# Altium PCB SX1276_e268v01a.PcbDoc
Units mm, origin at the board's own origin, x right, y up, seen from the top; angles counter-clockwise.
Board outline 65 x 36 mm, 4 copper layers (Top Layer, MidLayer1, MidLayer2, Bottom Layer), stack 1.661 mm thick; 94 components, 81 nets, 281 pads, 641 vias.
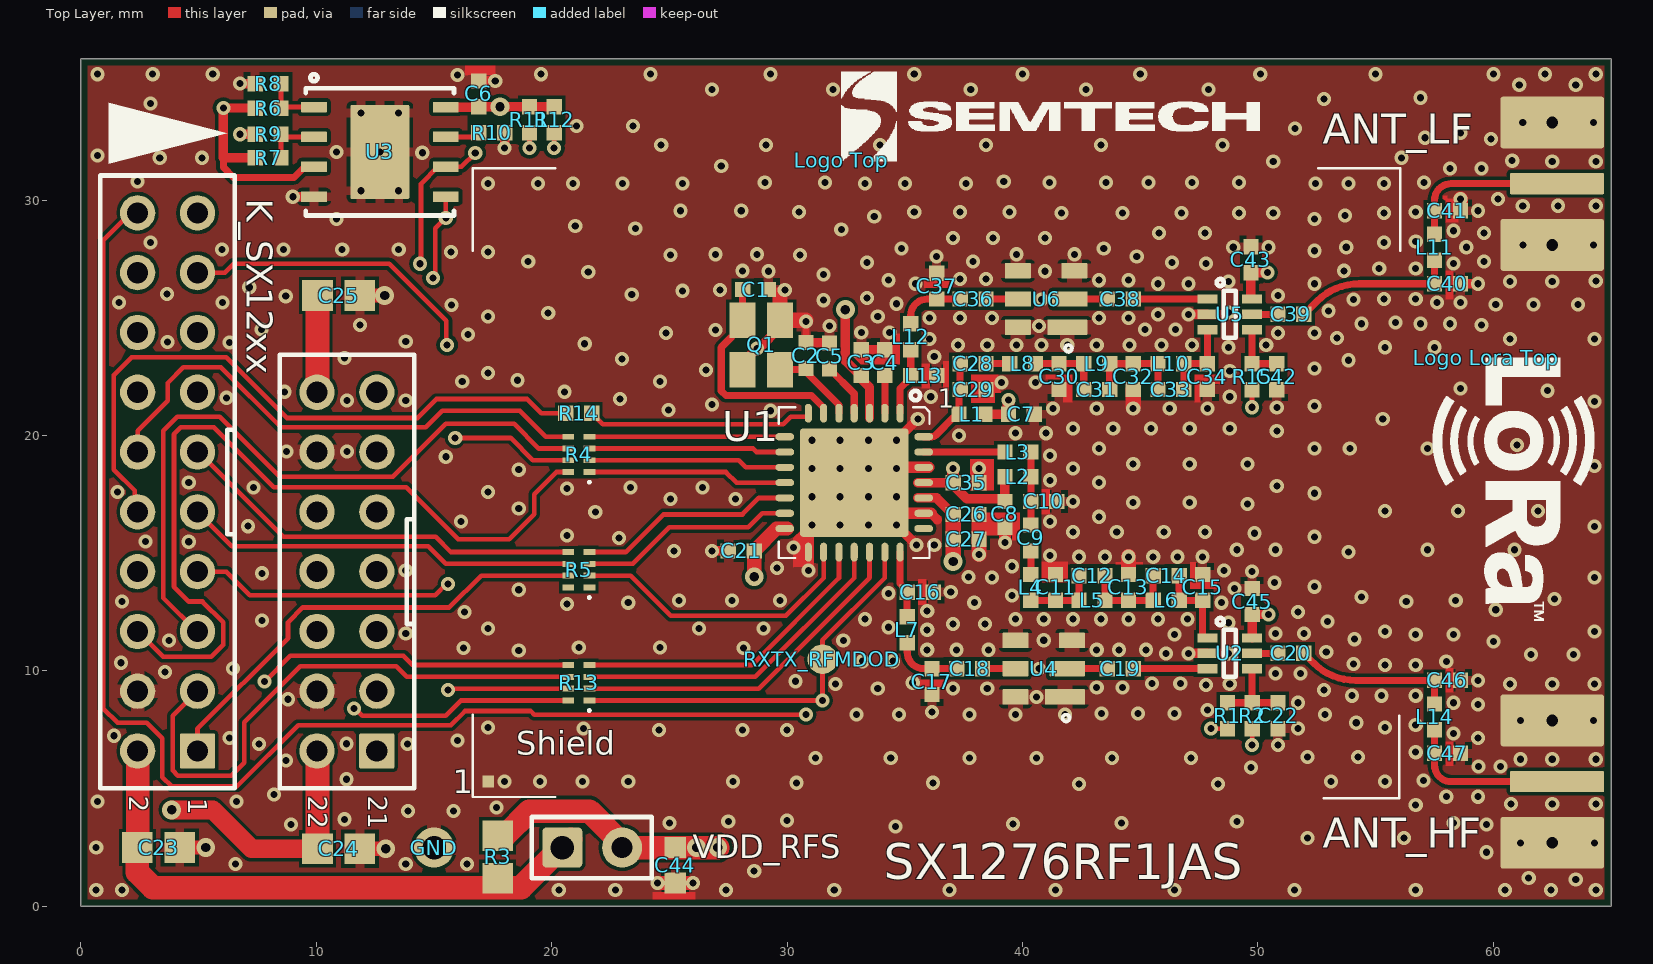
[diagram p0: Top Layer view]
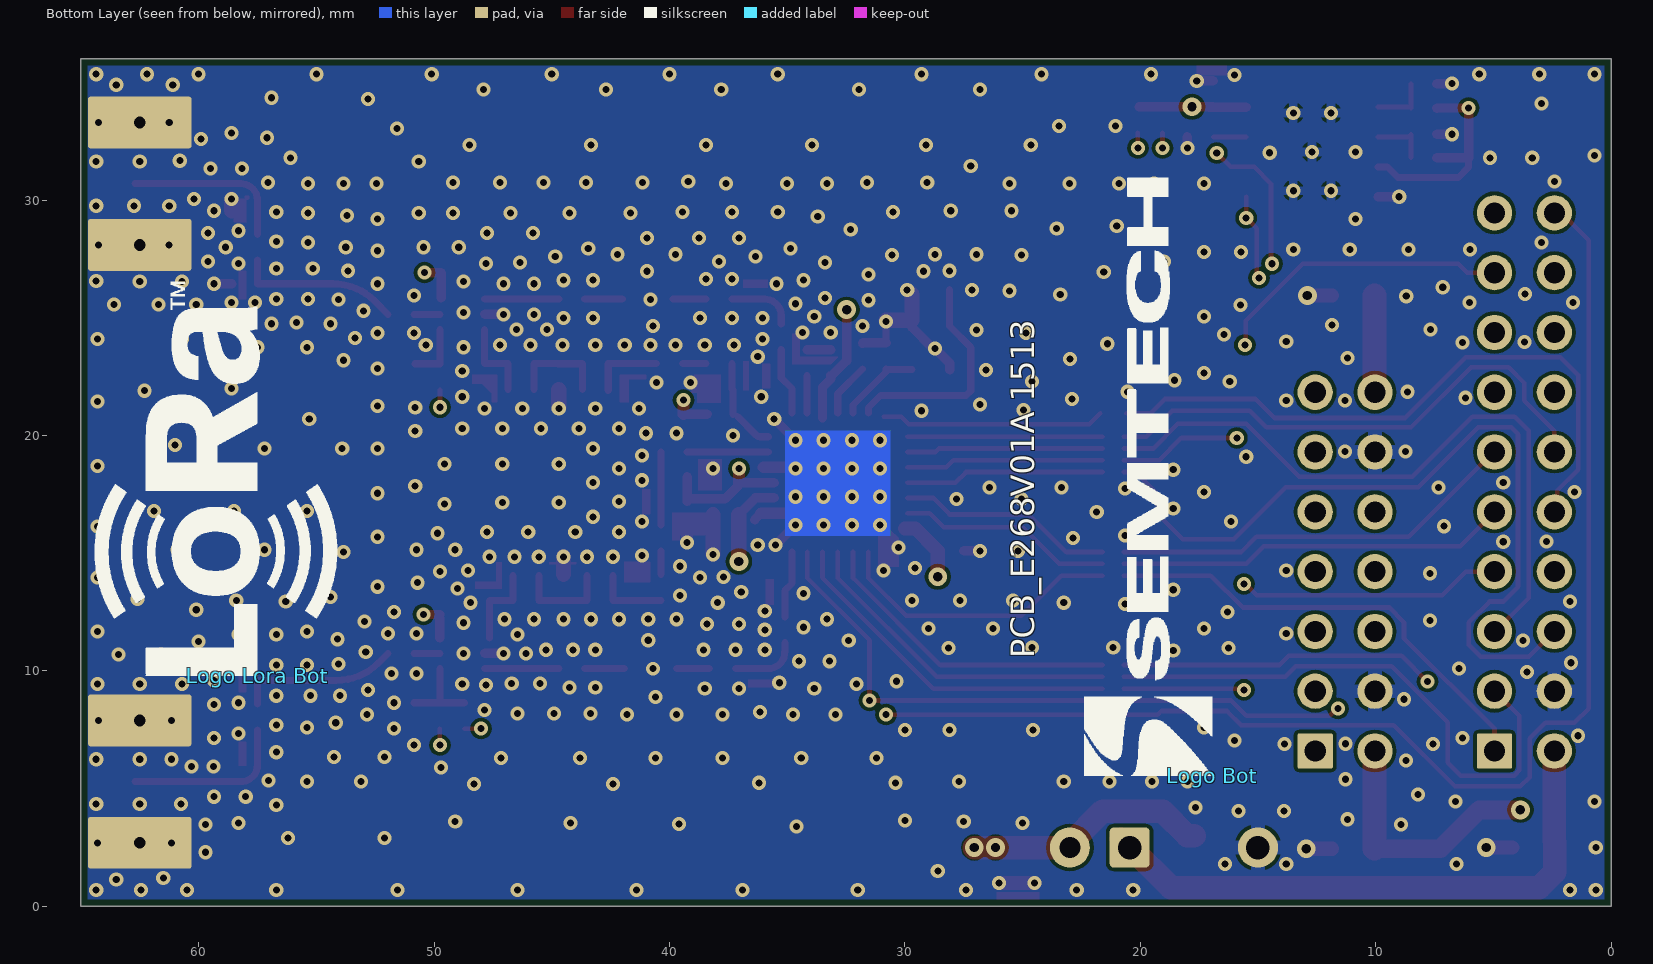
[diagram p1: Bottom Layer view, seen from below]
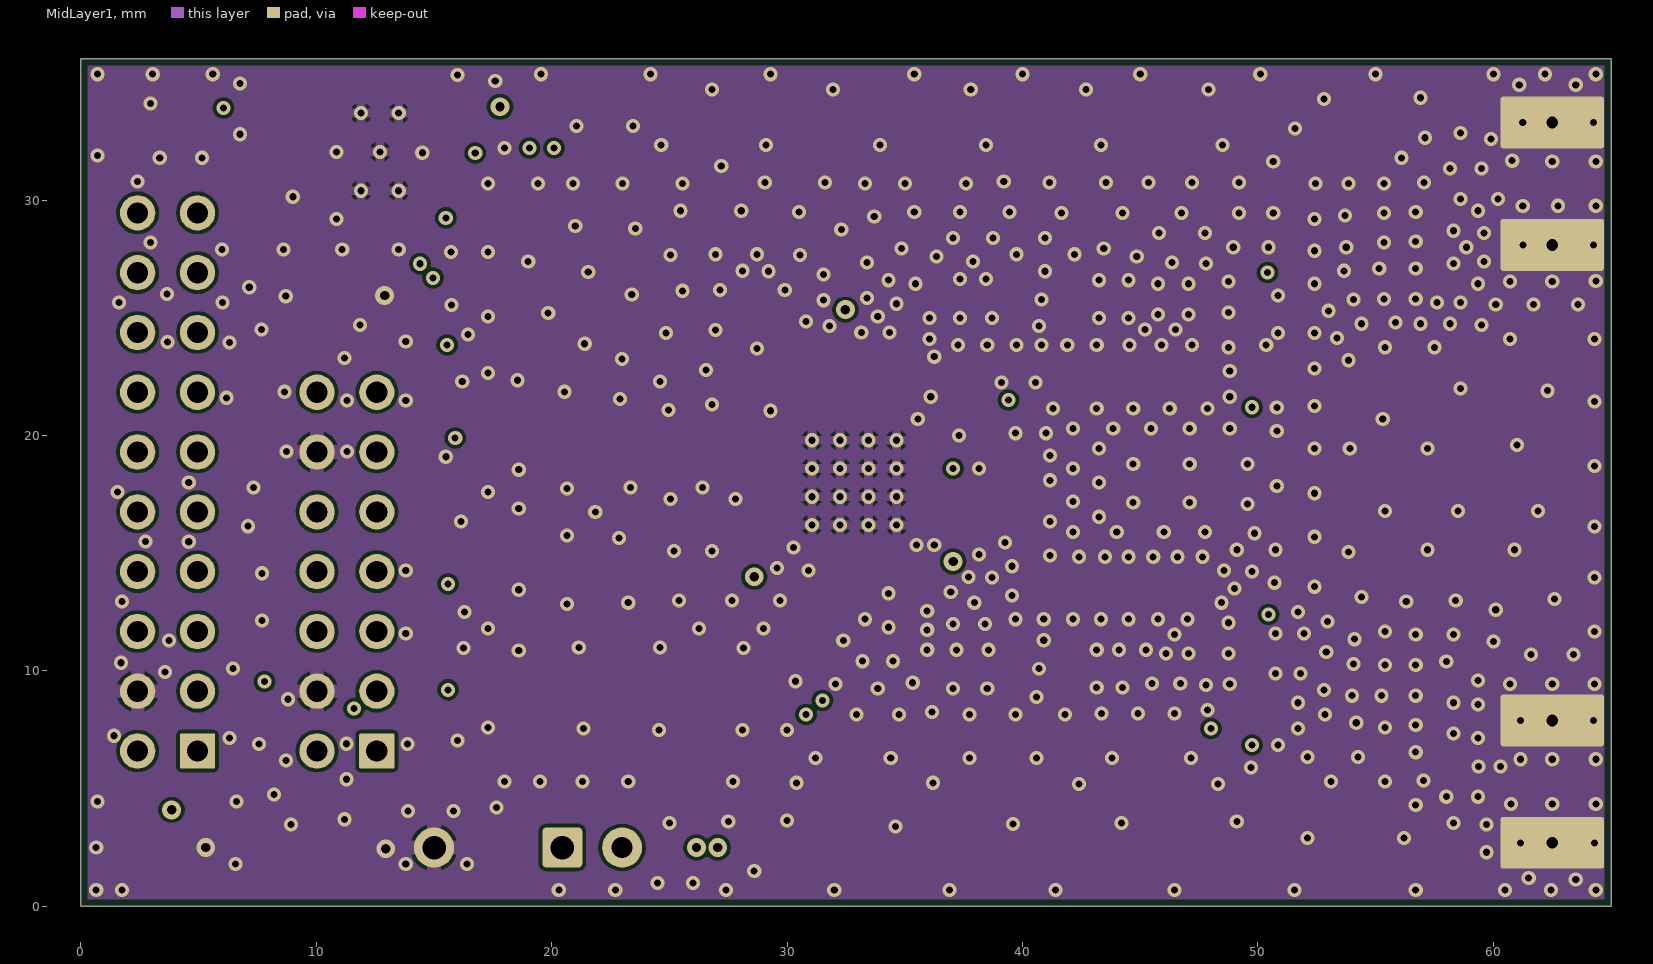
[diagram p2: MidLayer1]
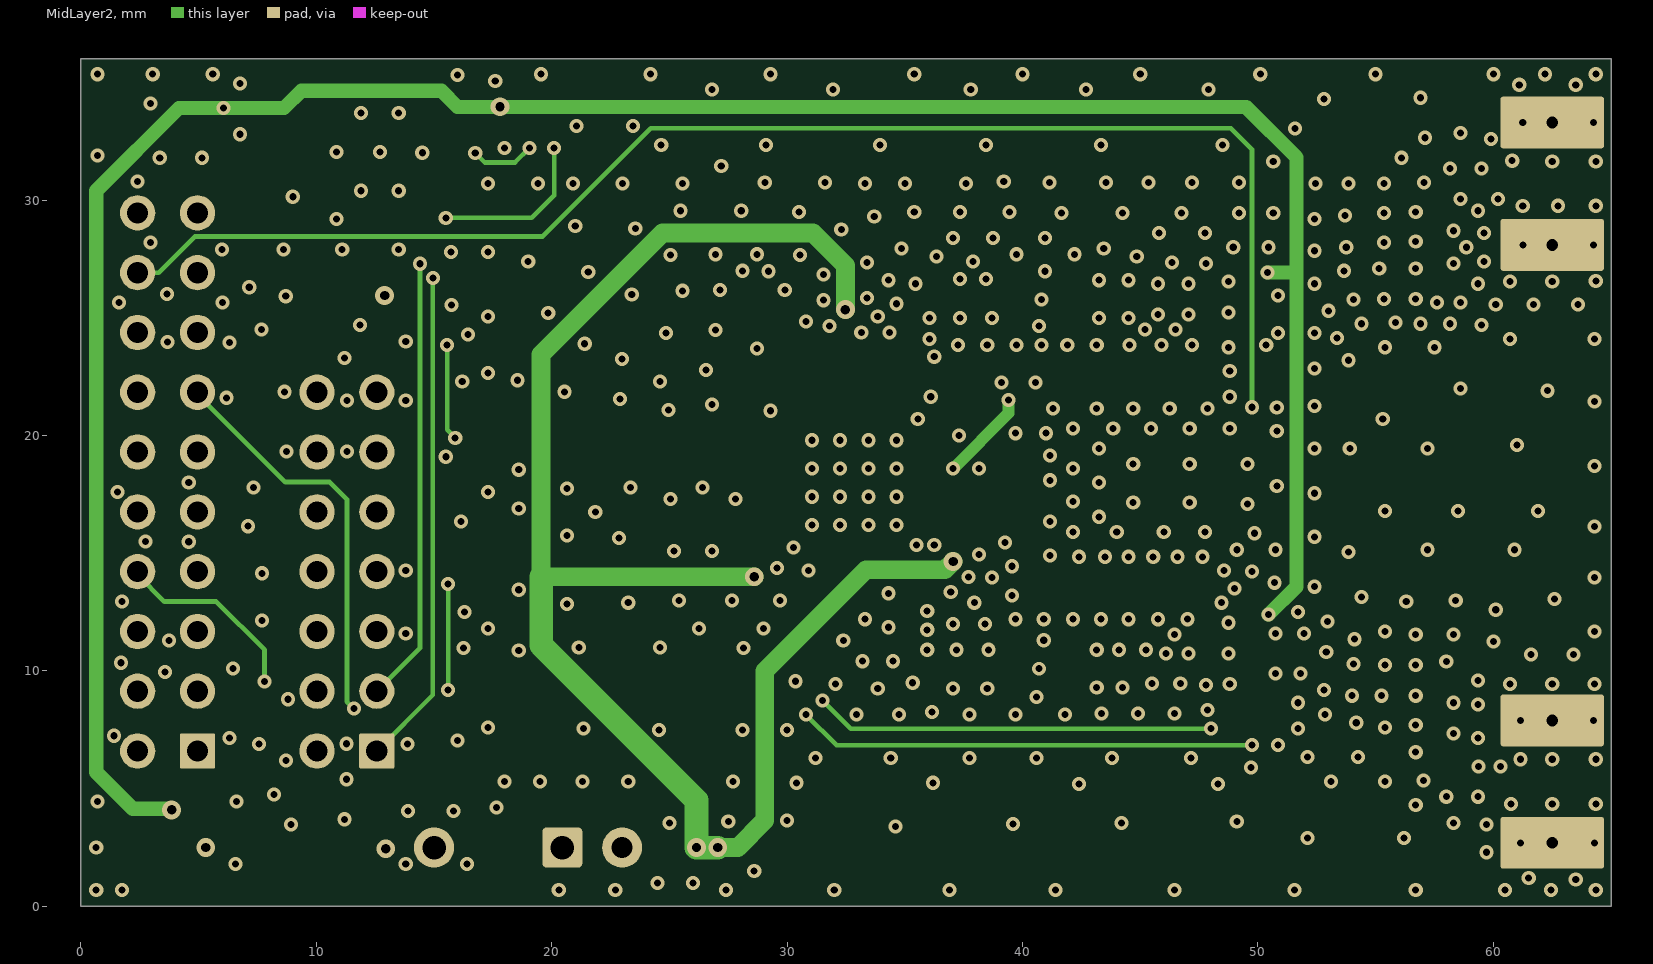
[diagram p3: MidLayer2]

## Layer stack, top to bottom
Top Layer: signal copper 0.035
Dielectric: core 0.2, FR-4, Dk 4.3
MidLayer1: signal copper 0.0356
Dielectric: prepreg 1.12, FR-4, Dk 4.3
MidLayer2: signal copper 0.0356
Dielectric: core 0.2, FR-4, Dk 4.3
Bottom Layer: signal copper 0.035

## Board outline
0,0 0,36 65,36 65,0

## Design rules (kind name [scope] priority, off if disabled: settings)
Clearance Clearance_GND [InNet('GND')] p1: gap=0.15
Clearance [All] p2: gap=0.15
ComponentClearance ComponentClearance_keepout ['SX1276_e268v01a' vs OnLayer('Mechanical 12')] p1: gap=0.25 collisioncheckmode=3 verticalgap=0.3 showdistances=FALSE
ComponentClearance [All] p2: gap=0.25 collisioncheckmode=3 verticalgap=0.3 showdistances=FALSE
HoleSize [All] p1: absolutevalues=TRUE maxlimit=3.6 minlimit=0.25 maxpercent=80.000 minpercent=20.000
HoleToHoleClearance [All] p1: gap=0.25 allowstackedmicrovias=TRUE
MinimumSolderMaskSliver [All] p1: minsoldermaskwidth=0.05
PlaneClearance [All] p1: clearance=0.2
PlaneConnect [All] p1: planeconnectstyle=Direct reliefexpansion=0.508 reliefentries=4 reliefconductorwidth=0.254 reliefairgap=0.254
PolygonConnect "PolygonConnect SAW SMD PACKAGE" [InNet('GND') vs HasFootprint('7.0X5.0MM SMD PACKAGE')   or  HasFootprint('DCC6C_3.0X3.0MM')] p1: connectstyle=Relief reliefconductorwidth=0.65 reliefentries=4 polygonreliefangle="90 Angle"
PolygonConnect "PolygonConnect SMD" [InNet('GND') vs HasFootprint('nd3225da - nd2520da') or HasFootprint('DD10_L') or HasFootprint('MSOP8')  or  HasFootprint('vqfn28_6x6mm') or HasFootprint('SOIC-SN8_L')  or HasFootprint('rlc_1206_smd capa pol') or HasFootprint('rlc_603_smd') or HasFootprint('rlc_402_smd') or HasFootprint('rlc_402_smd diode') or hasFootprint('rlc_805_smd') or HasFootprint('rlc_1210_smd')   or HasFootprint('MiniMold-6') or HasFootprint('DFN8_ 5x6mm') or HasFootprint('SC70-6')] p2: connectstyle=Relief reliefconductorwidth=0.4 reliefentries=4 polygonreliefangle="90 Angle"
PolygonConnect PolygonConnect_comp_diverse [InNet('GND') vs HasFootprint('CD1608-0603') or  HasFootprint('HDR34 Header') or  HasFootprint('BRIDGE_254MM') or  HasFootprint('pin_1mm') or HasFootprint('SMA_END_LAUNCH_JACK_RECEPTACLE')] p3: connectstyle=Relief reliefconductorwidth=0.6 reliefentries=4 polygonreliefangle="90 Angle"
PolygonConnect PolygonConnect_all [All] p4: connectstyle=Direct reliefconductorwidth=0.6 reliefentries=4 polygonreliefangle="90 Angle"
RoomDefinition SX1276_e268v01a [InComponentClass('SX1276_e268v01a')] p1: confinementstyle=ConfineOut formatcopy=TRUE lockcomponents=FALSE outline 73.45,41 73.45,52 83,52 83,41
RoutingVias [All] p1: holewidth=0.3 width=0.6 viastyle="Through Hole" minholewidth=0.25 minwidth=0.5 maxholewidth=0.4 maxwidth=0.8
SilkToSilkClearance [All] p1: silktosilkclearance=0.05
SilkscreenOverComponentPads [All] p1: minsilkscreentomaskgap=0.05
SolderMaskExpansion [All] p1: expansion=0.05
Width "Width GND" [InNet('GND')] p1: maxlimit=3 minlimit=0.2 preferedwidth=0.4
Width Width_VCC [InNet('VDD_RF') or  InNet('VDD_RFS') or  InNet('VCC') or  InNet('VBAT') or InNet('VSUPERCAP') or InNet('VCC_FEM')   or InNet('VCC_PA')] p2: maxlimit=2 minlimit=0.2 preferedwidth=0.8
Width "Width All" [All] p3: maxlimit=2 minlimit=0.15 preferedwidth=0.2
20 further rules are at their usual default settings.

## Components (designator, comment, footprint, x,y, rotation, side; value= is the part's Value field where it differs from the comment)
ANT_HF "SMA" "SMA END LAUNCH JACK RECEPTACLE SHORT" 62.7,5.3 r90 top locked
ANT_LF "SMA" "SMA END LAUNCH JACK RECEPTACLE SHORT" 62.7,30.7 r90 top locked
C1 "Cap" rlc_402_smd 28.66,26.203 r180 top
C2 "Cap" rlc_402_smd 30.798,23.4 r270 top
C3 "Cap" rlc_402_smd 33.15,23.1 r270 top
C4 "Cap" rlc_402_smd 34.15,23.1 r270 top
C5 "Cap" rlc_402_smd 31.8,23.376 r270 top
C6 "Cap" rlc_402_smd 16.9,34.515 r270 top
C7 "Cap" rlc_402_smd 39.95,20.905 r180 top
C8 "Cap" rlc_402_smd 39.25,16.65 r90 top
C9 "Cap" rlc_402_smd 40.35,15.65 r90 top
C10 "Cap" rlc_402_smd 40.9,17.2 r180 top
C11 "Cap" rlc_402_smd 41.4,13.55 r270 top
C12 "Cap" rlc_402_smd 42.95,14.05 r180 top
C13 "Cap" rlc_402_smd 44.5,13.55 r270 top
C14 "Cap" rlc_402_smd 46.1,14.05 r180 top
C15 "Cap" rlc_402_smd 47.65,13.55 r270 top
C16 "Cap" rlc_402_smd 35.65,13.35 r180 top
C17 "Cap" rlc_402_smd 36.15,9.55 r90 top
C18 "Cap" rlc_402_smd 37.75,10.1 r180 top
C19 "Cap" rlc_402_smd 44.15,10.1 r180 top
C20 "Cap" rlc_402_smd 51.4,10.75 r180 top
C21 "Cap" rlc_402_smd 28.05,15.1 r0 top
C22 "Cap" rlc_402_smd 50.851,8.1 r270 top
C23 "Cap" rlc_805_smd 3.299,2.5 r180 top
C24 "Cap" rlc_805_smd 10.949,2.45 r180 top
C25 "Cap" rlc_805_smd 10.949,25.95 r0 top
C26 "Cap" rlc_402_smd 37.6,16.65 r180 top
C27 "Cap" rlc_402_smd 37.6,15.6 r180 top
C28 "Cap" rlc_402_smd 37.9,23.055 r180 top
C29 "Cap" rlc_402_smd 37.9,21.955 r180 top
C30 "Cap" rlc_402_smd 41.55,22.505 r90 top
C31 "Cap" rlc_402_smd 43.15,21.955 r180 top
C32 "Cap" rlc_402_smd 44.7,22.505 r90 top
C33 "Cap" rlc_402_smd 46.3,21.955 r180 top
C34 "Cap" rlc_402_smd 47.85,22.505 r90 top
C35 "Cap" rlc_402_smd 37.6,18 r180 top
C36 "Cap" rlc_402_smd 37.9,25.8 r180 top
C37 "Cap" rlc_402_smd 36.35,26.35 r270 top
C38 "Cap" rlc_402_smd 44.15,25.8 r180 top
C39 "Cap" rlc_402_smd 51.4,25.15 r180 top
C40 "Cap" rlc_402_smd 58.05,26.45 r180 top
C41 "Cap" rlc_402_smd 58.05,29.55 r180 top
C42 "Cap" rlc_402_smd 50.8,22.5 r270 top
C43 "Cap" rlc_402_smd 49.702,27.472 r270 top
C44 "Cap Semi" rlc_603_smd 25.25,1.75 r90 top
C45 "Cap" rlc_402_smd 49.752,12.95 r270 top
C46 "Cap" rlc_402_smd 58.05,9.6 r180 top
C47 "Cap" rlc_402_smd 58.05,6.5 r180 top
GND "Test Pin" pin_1mm 15.5,3 r0 top
K_SX12xx "SM12xx Header" "HDR34 Header" 4.95,6.6 r90 top locked
L1 "Inductor" rlc_402_smd 37.85,20.905 r180 top
L2 "Inductor" rlc_402_smd 39.8,18.25 r180 top
L3 "Inductor" rlc_402_smd 39.8,19.3 r180 top
L4 "Inductor" rlc_402_smd 40.35,13.55 r270 top
L5 "Inductor" rlc_402_smd 42.95,13 r0 top
L6 "Inductor" rlc_402_smd 46.1,13 r0 top
L7 "Inductor" rlc_402_smd 35.1,11.75 r270 top
L8 "Inductor" rlc_402_smd 40,23.055 r0 top
L9 "Inductor" rlc_402_smd 43.15,23.05 r0 top
L10 "Inductor" rlc_402_smd 46.3,23.055 r0 top
L11 "Inductor" rlc_402_smd 57.5,28 r90 top
L12 "Inductor" rlc_402_smd 35.25,24.2 r90 top
L13 "Inductor" rlc_402_smd 35.8,22.551 r180 top
L14 "Inductor" rlc_402_smd 57.5,8.05 r270 top
"Logo Bot" "Logo symbol" logo_semtech_horiz_size3 16.95,5.55 r90 bottom
"Logo Lora Bot" "Logo symbol" "Logo LoRa Size4" 57.5,9.8 r90 bottom
"Logo Lora Top" "Logo symbol" "Logo LoRa Size3" 59.7,23.3 r270 top
"Logo Top" "Logo symbol" logo_semtech_horiz_size2 32.3,31.7 r0 top
Q1 "Xtal" "ND3225DA - ND2520DA" 28.9,23.85 r270 top
R1 "Resistor" rlc_402_smd 48.702,8.1 r90 top
R2 "Resistor" rlc_402_smd 49.752,8.1 r270 top
R3 "Resistor" rlc_805_smd 17.7,2.1 r270 top
R4 "EXBN8VxxxJX" EXB28V 21.15,19.2 r90 top
R5 "EXBN8VxxxJX" EXB28V 21.15,14.3 r90 top
R6 "Resistor" rlc_402_smd 7.95,33.9 r180 top
R7 "Resistor" rlc_402_smd 7.95,31.8 r180 top
R8 "Resistor" rlc_402_smd 7.95,34.95 r0 top
R9 "Resistor" rlc_402_smd 7.95,32.8 r0 top
R10 "Resistor" rlc_402_smd 17.45,32.865 r180 top
R11 "Resistor" rlc_402_smd 19.051,33.415 r90 top
R12 "Resistor" rlc_402_smd 20.101,33.415 r90 top
R13 "EXBN8VxxxJX" EXB28V 21.15,9.5 r90 top
R14 "Resistor" rlc_402_smd 21.15,20.95 r180 top
R15 "Resistor" rlc_402_smd 49.75,22.5 r270 top
RXTX_RFMDOD "Test Pin" pin_SMD 31.5,10.5 r90 top
Shield "Logo symbol" "BMIS-205-F - SHIELD" 17.3,5.3 r0 top locked
U1 "SX1276" VQFN28_6X6MM 32.85,18 r270 top locked
U2 "RF Switch" SC70-6 48.8,10.75 r0 top
U3 "24AA128-I/MF" "DFN8_ 5x6mm" 12.7,32.05 r270 top locked
U4 "SAW Filter" DCC6C_3.0X3.0MM 40.9,10.1 r180 top
U5 "RF Switch" SC70-6 48.8,25.15 r0 top
U6 "SAW Filter" DCC6C_3.0x3.0mm 41,25.8 r180 top
VDD_RFS "Jumper" BRIDGE_254MM 20.45,2.5 r0 top locked

## Footprints (in the part's own frame and the unit in brackets; to place one, negate y for a bottom-side part, rotate by r counter-clockwise, add the part's x,y. Pads: shape width x height; smd on the part's side, far side on the other; paste and mask are expansions set on the pad)
"BMIS-205-F - SHIELD" [mm] "BMIS-205-F EMI Gasket - Standard Surface Mount Shields -  Laird Technologies"
  rect 0.5x0.5 smd paste-1 mask+0.05: 1(0,0)
  Mechanical 15 keep-out lines w1: 0,0 38.1,0 38.1,25.4 0,25.4 0,0
  silkscreen extent -0.65,-0.7 38.75,26.05, body extent -0.3,-0.3 0.3,0.3, height 6.5
BRIDGE_254MM [mm] "Generic Bridge 2.54mm, 2 Leads 0.9mm;"
  rrect20% 1.7x1.7 hole 1 paste+0 mask+0.05: 1(0,0)
  round 1.7 hole 0.9 paste+0 mask+0.05: 2(2.54,0)
  silkscreen extent -1.3,-1.3 3.8,1.3, body extent -1.4,-1.4 3.9,1.4, height 1
DCC6C_3.0X3.0MM [mm] "DCC6C footprint, 3.0x3.0mm"
  rrect5% 1.7x0.65 smd mask+0.05: 1(-0.9,1.2)
  rrect5% 1.5x0.65 smd mask+0.05: 2(-1,0)
  rrect5% 1.1x0.65 smd mask+0.05: 3(-1.2,-1.2) 4(1.2,-1.2) 5(1.2,0) 6(1.2,1.2)
  silkscreen extent -1.1,1.95 -0.8,2.25, body extent -1.5,-1.5 1.5,1.5, height 1
DCC6C_3.0x3.0mm [mm] "DCC6C footprint, 3.0x3.0mm"
  rrect5% 1.7x0.65 smd mask+0.05: 1(-0.9,1.2)
  rrect5% 1.5x0.65 smd mask+0.05: 2(-1,0)
  rrect5% 1.1x0.65 smd mask+0.05: 3(-1.2,-1.2) 4(1.2,-1.2) 5(1.2,0) 6(1.2,1.2)
  silkscreen extent -1.1,1.95 -0.8,2.25, body extent -1.5,-1.5 1.5,1.5, height 1
"DFN8_ 5x6mm" [mm] "8 Leads, Body 5x6mm, pitch 1.27mm, DFN8"
  rrect10% 0.45x1.1 smd paste+0 mask+0.05: 1(-1.905,-2.8) 2(-0.635,-2.8) 3(0.635,-2.8) 4(1.905,-2.8) 5(1.905,2.8) 6(0.635,2.8) 7(-0.635,2.8) 8(-1.905,2.8)
  rrect5% 4x2.5 smd paste+0 mask+0.05: 9(0,0)
  silkscreen extent -3.3,-3.15 2.7,3.15, body extent -2.5,-3 2.5,3, height 12
EXB28V [mm] "Chip Resistor Array, (0402x4); SM; 8 Leads; Body 2.10 x 1.10 mm (LxW max)"
  rect 0.25x0.5 smd: 1(-0.75,-0.45) 2(-0.25,-0.45) 3(0.25,-0.45) 4(0.75,-0.45) 5(0.75,0.45) 6(0.25,0.45) 7(-0.25,0.45) 8(-0.75,0.45)
  silkscreen extent -1.23,-0.5 -1.13,-0.4
"HDR34 Header" [mm] "Connector; Header; 34 Position - SM12xx Header"
  rrect10% 1.5x1.5 hole 0.9 mask+0.05: 1(0,0) 21(0,-7.62)
  round 1.5 hole 0.9 mask+0.05: 2(0,2.54) 3(2.54,0) 4(2.54,2.54) 5(5.08,0) 6(5.08,2.54) 7(7.62,0) 8(7.62,2.54) 9(10.16,0) 10(10.16,2.54) 11(12.7,0) 12(12.7,2.54) 13(15.24,0) 14(15.24,2.54) 15(17.78,0) 16(17.78,2.54) 17(20.32,0) 18(20.32,2.54) 19(22.86,0) 20(22.86,2.54) 22(0,-5.08) 23(2.54,-7.62) 24(2.54,-5.08) 25(5.08,-7.62) 26(5.08,-5.08) 27(7.62,-7.62) 28(7.62,-5.08) 29(10.16,-7.62) 30(10.16,-5.08) 31(12.7,-7.62) 32(12.7,-5.08) 33(15.24,-7.62) 34(15.24,-5.08)
  silkscreen extent -1.59,-9.21 27.53,4.13, body extent -1.59,-9.21 24.45,4.13
"Logo LoRa Size3" [mm] "Logo LoRa Size3 - Top Overlay"
  silkscreen extent 0,-2.26 11.16,4.59
"Logo LoRa Size4" [mm] "Logo LoRa Size4 - Top Overlay"
  silkscreen extent 0,-3.38 16.73,6.89, body extent -0.01,-3.39 16.74,6.9
logo_semtech_horiz_size2 [mm] "Logo semtech horizontal - size2 - M"
  silkscreen extent 0,-0.03 17.78,3.76, body extent 0,0 0.08,0, height 6
logo_semtech_horiz_size3 [mm] "Logo semtech horizontal - size3 - L"
  silkscreen extent 0,0 25.4,5.41, body extent -0.01,-0.01 25.41,5.42
"ND3225DA - ND2520DA" [mm] "Crystal SMD 3.2x2.5mm compatible with 2.5x2.0mm"
  rect 1.5x1.1 smd mask+0.05: 1(-1.05,-0.8) 2(1.05,-0.8) 3(1.05,0.8) 4(-1.05,0.8)
  body extent -1.6,-1.25 1.6,1.25, height 1
pin_1mm [mm] "Generic Pin 1.1mm; 1 Lead"
  round 1.7 hole 1 paste+0 mask+0.05: 1(-0.5,-0.5)
pin_SMD [mm] "Generic Pin; 1 pin SMD"
  round 1.27 smd paste-1 mask+0.05: 1(0,0)
rlc_402_smd [mm] "Chip SMD component 402; Body 1.0 x 0.5 mm (LxW typ)"
  rect 0.65x0.65 smd mask+0.05: 1(-0.55,0) 2(0.55,0)
rlc_603_smd [mm] "Chip SMD component 603; Body 1.6 x 0.8mm (LxW typ)"
  rect 0.9x0.9 smd paste+0 mask+0.05: 1(-0.75,0) 2(0.75,0)
rlc_805_smd [mm] "Chip SMD component 805; Body 2.0 x 1.25 mm (LxW typ)"
  rect 1.3x1.3 smd mask+0.05: 1(-0.9,0) 2(0.9,0)
SC70-6 [mm] "SC70 6-Leads, Body 2.0x1.25mm, Pitch 0.65mm"
  rect 0.85x0.4 smd mask+0.05: 1(-0.95,0.65) 2(-0.95,0) 3(-0.95,-0.65) 4(0.95,-0.65) 5(0.95,0) 6(0.95,0.65)
  silkscreen extent -0.55,-1 0.25,1.5, body extent -0.63,-1 0.63,1, height 1.45
"SMA END LAUNCH JACK RECEPTACLE SHORT" [mm] "SMA Connector - End Launch Jack Receptacle - Short"
  rrect10% 0.9x4 smd paste+0 mask+0.05: 1(0,0)
  rrect10% 2.2x4.4 hole 0.5 mask+0.05: 2(-2.6,0.2) 2(2.6,0.2)
  body extent -0.5,-2.05 0.5,2.05, height 8
VQFN28_6X6MM [mm] "28 Leads, Body 6.0x6.0mm, Pitch 0.65mm, VQFN28"
  oval 0.8x0.3 smd mask+0.05: 1(-2.95,1.95) 2(-2.95,1.3) 3(-2.95,0.65) 4(-2.95,0) 5(-2.95,-0.65) 6(-2.95,-1.3) 7(-2.95,-1.95) 15(2.95,-1.95) 16(2.95,-1.3) 17(2.95,-0.65) 18(2.95,0) 19(2.95,0.65) 20(2.95,1.3) 21(2.95,1.95)
  oval 0.3x0.8 smd mask+0.05: 8(-1.95,-2.95) 9(-1.3,-2.95) 10(-0.65,-2.95) 11(0,-2.95) 12(0.65,-2.95) 13(1.3,-2.95) 14(1.95,-2.95) 22(1.95,2.95) 23(1.3,2.95) 24(0.65,2.95) 25(0,2.95) 26(-0.65,2.95) 27(-1.3,2.95) 28(-1.95,2.95)
  rrect5% 4.6x4.6 smd paste-3.3 mask+0.05: 29(0,0)
  Mechanical 15 keep-out lines w0.1: 3.5,-3.5 3.5,3.5 -3.5,3.5 -3.5,-3.5 3.5,-3.5
  silkscreen extent -3.9,-3.2 3.2,3.2, body extent -3,-3 3,3, height 1

## Part data
ANT_HF ANT_LF: "SMA Straight Connector"
C1 C2 C3 C4 C5 C6 C7 C8 C9 C10 C11 C12 C13 C14 C15 C16 C17 C18 C19 C20 C21 C22 C23 C24 C25 C26 C27 C28 C29 C30 C31 C32 C33 C34 C35 C36 C37 C38 C39 C40 C41 C42 C43 C45 C46 C47: "Capacitor SMD"
C44: "Capacitor (Semiconductor SIM Model)"
GND RXTX_RFMDOD: library part test_pin
K_SX12xx: "SM12xx Header; 34pins: 2x10pins + 2x7pins"
L1 L2 L3 L4 L5 L6 L7 L8 L9 L10 L11 L12 L13 L14: "Inductor SMD"
"Logo Bot" "Logo Lora Bot" "Logo Lora Top" "Logo Top": library part Logo, "Schematic symbol for Logo"
Q1: library part "Xtal GND", "Crystal with GND pins"
R1 R2 R3 R6 R7 R8 R9 R10 R11 R12 R14 R15: "Resistor SMD - IEC symbol version"
R4 R5 R13: "Mini-Flat Package, Isolated Resistor Network, 0.031 W/resistor"
Shield: library part Shield, "Shield - EMI Gasket - Standard Surface Mount Shields"
U1: "SX1276 - Low Power Integrated UHF Transceiver with loRa Modem"
U2 U5: library part "PE4259 RF Switch", "PE4259 Peregrine RF Switch"
U3: "128kbit, 400kHz, 1.7V, 8-Pin DFN, Industrial Temperature"
U4 U6: "SAW Filter - Bandpass - TEMEX type"
VDD_RFS: "Jumper Wire"

## Via types
v1: diameter 0.6, hole 0.3, Top Layer to Bottom Layer, tented both sides, 609 vias
v2: diameter 0.6, hole 0.3, Top Layer to Bottom Layer, tented top, 21 vias
v3: diameter 0.8, hole 0.4, Top Layer to Bottom Layer, tented both sides, 10 vias
v4: diameter 0.58, hole 0.3, Top Layer to Bottom Layer, tented both sides, 1 vias

## Nets (pads, with @x,y where several pads share a name; then routed paths per layer and width w, separated by ;. In a path a pad name is that pad's centre, name@x,y a point inside that pad or via, vN(x,y) a via of type N, cw(c..) or ccw(c..) an arc to the next point about the centre after c; other vN are vias at no path point)
DIO0: K_SX12xx.12 R4.5 | length 22.6
  Top Layer w0.2: K_SX12xx.12 2.41,20.21 3.683,21.483 3.683,22.233 4.35,22.9 5.95,22.9 8.5,20.35 14.65,20.35 15.35,21.05 18.65,21.05 19.75,19.95 R4.5
DIO0_SX: R4.4 U1.8 | length 8.3
  Top Layer w0.2: R4.4 U1.8
DIO1: K_SX12xx.5 R4.6 | length 29
  Top Layer w0.2: K_SX12xx.5 4.92,11.68 3.5,13.1 3.5,20.2 4.1,20.8 5.9,20.8 8.45,18.25 13.256,18.25 15.506,20.5 18.4,20.5 19.45,19.45 R4.6
DIO1_SX: R4.3 U1.9 | length 8.4
  Top Layer w0.2: R4.3 28.55,19.45 28.7,19.3 U1.9
DIO2: K_SX12xx.17 R4.7 | length 22.1
  Top Layer w0.2: K_SX12xx.17 6.12,26.92 6.5,27.3 13.1,27.3 15.524,24.876 15.524,23.885 v1(15.559,23.85) ; v1(15.9,19.9) 18.25,19.9 19.2,18.95 R4.7
  MidLayer2 w0.2: v1(15.559,23.85) 15.559,20.241 v1(15.9,19.9)
DIO2_SX: R4.2 U1.10 | length 8.4
  Top Layer w0.2: R4.2 27.95,18.95 28.25,18.65 U1.10
DIO3: K_SX12xx.6 R4.8 | length 35
  Top Layer w0.2: K_SX12xx.6 3.49,10.6 5.54,10.6 6.045,11.105 6.045,12.068 5.163,12.95 4.58,12.95 3.95,13.58 3.95,20.06 4.24,20.35 5.65,20.35 8.2,17.8 13.821,17.8 16.019,15.601 18.201,15.601 19.26,16.66 19.26,17.51 20.2,18.45 R4.8
DIO3_SX: R4.1 U1.11 | length 8.5
  Top Layer w0.2: R4.1 27.4,18.45 27.85,18 U1.11
DIO4: K_SX12xx.11 R5.5 | length 17.5
  Top Layer w0.2: K_SX12xx.11 5,19.3 8.6,15.7 15.071,15.7 15.721,15.05 R5.5
DIO4_SX: R5.4 U1.12 | length 9.3
  Top Layer w0.2: R5.4 23.15,15.05 24.75,16.65 28.1,16.65 28.8,17.35 U1.12
DIO5: K_SX12xx.9 R5.6 | length 16.7
  Top Layer w0.2: K_SX12xx.9 6.41,15.3 14.75,15.3 15.5,14.55 R5.6
DIO5_SX: R5.3 U1.13 | length 9.2
  Top Layer w0.2: R5.3 23.45,14.55 25,16.1 28.35,16.1 28.95,16.7 U1.13
FEM_ANT_SEL: K_SX12xx.16
FEM_CPS: K_SX12xx.18 R15.2 | length 61.9
  Top Layer w0.2: v1(49.75,21.202) R15.2
  MidLayer2 w0.2: K_SX12xx.18 3.31,26.92 4.85,28.46 19.61,28.46 24.2,33.05 48.85,33.05 49.75,32.15 v1(49.75,21.202)
FEM_CSD: K_SX12xx.19
FEM_CTX: K_SX12xx.20 R2.2 | length 75.6
  Top Layer w0.2: K_SX12xx.20 2.11,29.46 0.95,28.3 0.95,8.405 1.555,7.8 2.8,7.8 3.458,7.142 3.458,5.492 3.85,5.1 6.63,5.1 9.23,7.7 15.719,7.7 16.319,8.3 19.1,8.3 19.26,8.14 v1@30.8,8.14 ; v1@49.752,6.9 R2.2
  MidLayer2 w0.2: v1(30.8,8.15) 32.1,6.85 v1@49.75,6.85
  other v1: 49.752,6.85
FEM_SPARE: K_SX12xx.14
GND: ANT_HF.2 ANT_LF.2 C1.1 C2.1 C3.1 C4.1 C5.1 C6.1 C7.1 C8.1 C10.1 C11.1 C13.1 C15.1 C16.1 C17.1 C21.1 C22.2 C23.1 C24.1 C25.2 C26.1 C27.1 C29.1 C30.1 C32.1 C34.1 C35.1 C37.1 C40.1 C41.1 C42.2 C43.1 C44.1 C45.1 C46.1 C47.1 GND.1 K_SX12xx.4 K_SX12xx.24 K_SX12xx.32 L13.1 Q1.2 Q1.4 R8.1 R9.1 R10.1 Shield.1 U1.15 U1.23 U1.26 U1.29 U2.2 U3.4 U3.9 U4.1 U4.3 U4.4 U4.6 U5.2 U6.1 U6.3 U6.4 U6.6 | length 44.1
  Top Layer w0.2: Q1.4@29.7,24.601 Q1.4
  Top Layer w0.3: C2.1 v1(30.798,24.849) ; v2(31.05,19.8) v2(32.25,18.6) U1.29
  Top Layer w0.4: v1(6.75,32.8) R9.1 ; v1(6.75,34.95) R8.1 ; v1(9,30.145) U3.4 ; C6.1 v1(17.6,35.065) ; v1(18,32.215) R10.1@18,32.689 ; v1(26.8,15.1) C21.1 ; Q1.2 28.1,23.08 v1(28.72,23.699) ; v1@28.799,23.699 Q1.4@29.7,24.601 ; C2.1 31.776,23.95 C5.1 ; U1.29@31.124,16.134 v2(32.25,17.4) U1.29 ; C3.1 C4.1 ; v1(35.5,15.35) 34.15,16.7 U1.29 ; v1(35.55,20.7) v2(34.65,19.8) v2(33.45,18.6) U1.29 ; U1.23@36.107,16.7 36.375,16.432 ; C29.1 38.75,22.255 v1(39.101,22.255) v1@39.11,22.255 ; v1(47.05,10.75) U2.2 ; v1(47.05,25.15) U5.2 ; C40.1 v1(59.35,26.45)
  Top Layer w0.5: v1(30.9,14.276) U1.15 U1.29@30.9,16.05 ; U1.29@33.517,18.65 U1.26 U1.26@36,18.65 ; U1.29@34.15,16.7 U1.23 U1.23@36.107,16.7 ; C27.1@38.15,15.55 C27.1 ; v1(39.25,15.45) C8.1
  Top Layer w0.6: C23.1 v3(5.3,2.5) ; C24.1 v3(12.95,2.45) ; C25.2 v3(12.9,25.95) ; v1(24.5,1) C44.1 v1(26,1)
  Top Layer w0.65: v1@29.7,26 Q1.4 v1@30.798,24.9 ; v1(38.15,14.95) 38.15,15.55 C26.1 ; C35.1 v1(38.15,18.6) ; C13.1 v1(44.5,14.85) ; C32.1 44.7,21.207 v1@44.705,21.202 ; C41.1 v1(58.6,30.05)
  other v1: 0.65,0.7 1.744,0.7 20.3,0.7 22.7,0.7 27.4,0.7 32,0.7 36.9,0.7 41.4,0.7 46.45,0.7 51.55,0.7 56.7,0.7 60.5,0.7 62.45,0.7 64.35,0.7 63.5,1.15 61.5,1.2 28.6,1.5 6.574,1.8 13.798,1.8 16.4,1.8 59.7,2.3 0.65,2.5 61.15,2.692 64.3,2.685 52.1,2.9 56.2,2.9 34.6,3.4 8.929,3.481 59.7,3.481 39.6,3.5 25,3.55 44.2,3.55 58.3,3.55 27.5,3.6 49.1,3.6 30,3.65 11.2,3.7 13.89,4.05 15.821,4.05 17.65,4.2 56.7,4.3 60.745,4.35 62.5,4.35 64.35,4.35 0.7,4.45 6.606,4.45 58,4.659 59.35,4.659 8.2,4.75 42.4,5.2 48.3,5.2 30.4,5.25 36.2,5.25 18,5.3 19.5,5.3 21.3,5.3 23.25,5.3 27.7,5.3 53.1,5.3 55.402,5.3 57.025,5.35 11.279,5.4 49.7,5.9 60.3,5.941 59.365,5.95 8.714,6.2 61.15,6.25 62.5,6.25 64.35,6.25 31.2,6.3 34.4,6.3 37.75,6.3 40.6,6.3 43.8,6.3 47.15,6.3 52.1,6.35 54.25,6.35 56.7,6.55 50.85,6.85 7.567,6.9 11.28,6.908 13.88,6.9 16,7.05 6.31,7.15 59.344,7.15 1.4,7.25 58.3,7.35 24.55,7.5 28.1,7.5 30,7.5 21.35,7.55 51.7,7.55 17.3,7.6 55.402,7.6 56.7,7.7 54.175,7.8 61.15,7.9 64.25,7.9 32.95,8.15 34.75,8.15 37.75,8.15 39.7,8.15 41.8,8.15 52.85,8.15 43.35,8.2 44.9,8.2 46.45,8.2 36.15,8.25 47.85,8.35 59.35,8.583 51.7,8.65 58.3,8.65 8.8,8.8 40.6,8.9 54,8.95 55.25,8.95 56.7,8.95 52.8,9.2 33.85,9.25 37.05,9.25 38.5,9.25 43.15,9.3 44.25,9.3 47.8,9.4 32.05,9.45 48.8,9.45 60.7,9.45 62.5,9.45 64.3,9.45 45.5,9.467 46.7,9.475 35.334,9.5 30.35,9.563 59.35,9.6 50.75,9.9 51.8,9.9 3.573,9.95 6.461,10.1 55.4,10.25 56.7,10.25 54.05,10.3 1.7,10.35 33.2,10.415 34.5,10.415 58,10.4 61.6,10.7 63.4,10.7 46.1,10.75 48.75,10.75 52.9,10.8 18.6,10.876 35.95,10.9 37.2,10.9 38.55,10.9 43.15,10.9 44.1,10.9 45.25,10.9 16.25,10.97 28.15,10.97 21.15,11 24.6,10.999 60,11.25 3.74,11.3 32.385,11.3 40.9,11.306 54.1,11.35 46.45,11.55 56.7,11.55 58.3,11.55 13.798,11.6 50.75,11.6 51.95,11.6 55.4,11.68 64.3,11.68 35.95,11.75 17.286,11.8 26.25,11.8 29,11.8 34.307,11.856 37.05,12 38.4,12 48.75,12.05 52.95,12.1 7.7,12.15 33.3,12.2 39.7,12.2 40.9,12.2 42.15,12.2 43.34,12.2 44.5,12.2 45.75,12.2 47,12.2 16.3,12.5 51.7,12.5 35.95,12.55 60.1,12.6 20.65,12.85 23.25,12.9 37.95,12.9 48.45,12.9 1.75,12.95 56.3,12.95 25.4,13 27.65,13 29.7,13 58.4,13 62.6,13.05 54.4,13.15 39.55,13.2 34.307,13.3 36.95,13.35 18.6,13.45 49,13.5 52.4,13.58 50.7,13.75 38.7,13.965 64.3,13.965 37.7,14 7.7,14.15 49.75,14.22 13.798,14.276 48.55,14.276 29.57,14.37 39.55,14.45 42.4,14.85 43.5,14.85 45.55,14.85 46.579,14.85 47.65,14.85 41.166,14.9 53.85,15.05 25.2,15.1 49.1,15.15 50.75,15.15 57.2,15.15 60.9,15.15 30.274,15.25 36.25,15.35 4.58,15.49 2.75,15.505 22.85,15.65 52.4,15.7 20.65,15.75 49.85,15.85 42.15,15.9 44,15.9 46,15.9 47.75,15.9 64.3,16.134 7.1,16.15 16.15,16.35 41.166,16.35 43.25,16.55 21.85,16.75 55.4,16.8 58.5,16.8 61.9,16.8 18.6,16.9 49.55,17.1 44.7,17.15 47.1,17.15 42.15,17.2 25.05,17.3 27.8,17.3 52.4,17.55 1.55,17.6 17.3,17.6 20.65,17.75 7.326,17.8 23.35,17.8 26.4,17.8 50.8,17.85 4.58,18 43.25,18 41.166,18.1 18.6,18.55 42.15,18.6 64.3,18.7 44.7,18.8 47.1,18.8 49.55,18.8 15.5,19.1 41.166,19.15 8.725,19.325 11.3,19.325 43.25,19.45 52.4,19.45 53.9,19.45 57.2,19.45 61,19.6 37.3,20 39.7,20.1 41,20.1 50.8,20.2 42.15,20.3 43.85,20.3 45.45,20.3 47.1,20.3 48.8,20.3 55.3,20.7 29.3,21.055 24.952,21.085 41.3,21.15 43.15,21.15 44.7,21.15 46.25,21.15 47.85,21.15 50.8,21.2 52.4,21.25 26.8,21.325 64.3,21.45 11.3,21.483 13.798,21.483 22.9,21.55 6.178,21.605 36.1,21.65 48.8,21.65 8.65,21.859 20.55,21.859 62.3,21.906 58.6,22 40.55,22.255 16.2,22.3 24.6,22.3 18.55,22.35 17.286,22.65 48.8,22.75 26.55,22.791 52.4,22.85 53.85,23.2 22.99,23.25 11.2,23.3 36.25,23.35 48.75,23.75 55.402,23.75 57.5,23.75 37.25,23.85 38.5,23.85 39.75,23.85 40.8,23.85 41.9,23.85 43.15,23.85 44.55,23.85 45.9,23.85 47.2,23.85 50.35,23.85 21.4,23.9 6.31,23.95 3.683,23.975 13.798,24 36.05,24.1 60.7,24.1 64.3,24.1 53.35,24.15 16.45,24.3 24.85,24.35 50.85,24.35 52.4,24.35 33.15,24.38 34.35,24.38 26.95,24.483 7.666,24.5 45.2,24.5 46.5,24.5 31.8,24.65 40.7,24.65 11.861,24.7 59.5,24.7 54.4,24.75 56.9,24.75 58.15,24.75 55.85,24.8 36.05,25 37.35,25 38.7,25 43.25,25 44.5,25 17.3,25.05 33.85,25.05 45.75,25.15 19.85,25.2 48.75,25.226 53,25.3 15.75,25.55 60.1,25.571 61.7,25.571 63.6,25.571 34.65,25.6 1.625,25.65 6.014,25.65 57.6,25.65 58.6,25.65 31.55,25.75 40.8,25.781 54.05,25.781 55.35,25.8 56.7,25.8 33.4,25.85 8.7,25.92 50.85,25.95 3.652,26.012 23.4,26 25.55,26.15 27.15,26.178 29.9,26.178 7.15,26.3 35.45,26.45 45.75,26.45 47.05,26.45 52.4,26.45 48.75,26.55 60.7,26.55 62.5,26.55 64.35,26.57 34.3,26.6 43.25,26.6 44.5,26.6 37.35,26.65 38.452,26.65 31.55,26.85 21.55,26.95 29.21,26.979 40.95,26.979 28.1,27 53.65,27 55.15,27.1 56.7,27.1 47.8,27.315 58.3,27.315 33.4,27.35 46.35,27.35 19,27.4 37.9,27.4 59.6,27.4 36.35,27.6 44.85,27.6 25.05,27.672 30.55,27.672 26.95,27.7 28.72,27.7 39.75,27.7 42.2,27.7 15.719,27.8 17.3,27.8 52.4,27.85 6,27.9 8.6,27.9 11.1,27.9 13.5,27.9 34.85,27.95 43.45,27.95 48.95,28 50.45,28 53.75,28 58.85,28 61.261,28.1 64.25,28.1 2.95,28.194 55.35,28.2 56.7,28.25 37.05,28.4 38.75,28.4 40.95,28.4 45.8,28.6 47.75,28.6 59.6,28.6 58.3,28.7 32.3,28.75 23.55,28.8 21,28.9 10.851,29.2 52.4,29.2 33.7,29.3 53.7,29.35 41.65,29.46 44.25,29.45 46.75,29.45 49.2,29.46 50.65,29.46 55.35,29.46 30.5,29.5 35.4,29.5 37.35,29.5 39.45,29.5 56.7,29.5 25.476,29.55 28.05,29.55 59.35,29.55 61.247,29.75 62.75,29.761 64.35,29.761 60.2,30.05 17.3,30.7 19.423,30.7 20.9,30.7 23,30.7 25.55,30.7 33.3,30.7 35,30.7 37.6,30.7 52.45,30.7 53.85,30.7 55.35,30.7 29.05,30.75 31.6,30.75 41.15,30.75 43.55,30.75 45.35,30.75 47.2,30.75 49.2,30.75 57.05,30.75 2.4,30.793 39.2,30.793 58.15,31.35 59.5,31.35 27.2,31.45 50.65,31.65 62.5,31.65 64.35,31.65 60.8,31.676 3.35,31.8 5.15,31.8 56.1,31.8 0.7,31.9 14.501,32.015 10.851,32.05 24.65,32.35 29.1,32.35 33.95,32.35 38.45,32.35 43.34,32.35 48.5,32.35 59.9,32.6 57.1,32.65 58.6,32.85 51.58,33.05 21.05,33.15 23.45,33.15 61.247,33.3 64.25,33.3 2.95,34.1 52.8,34.3 56.9,34.35 26.8,34.7 31.95,34.7 37.8,34.7 42.7,34.7 47.9,34.7 61.1,34.9 63.5,34.9 16.001,35.315 0.7,35.35 3.05,35.35 5.6,35.35 19.55,35.35 24.2,35.35 29.3,35.35 35.4,35.35 40,35.35 45,35.35 50.099,35.35 55,35.35 60,35.35 62.2,35.35 64.35,35.35
  other v2: 31.05,16.2 32.25,16.2 33.45,16.2 34.65,16.2 31.05,17.4 33.45,17.4 34.65,17.4 31.05,18.6 34.65,18.6 32.25,19.8 33.45,19.8 11.9,30.4 13.5,30.4 12.7,32.05 11.9,33.7 13.5,33.7
  other v4: 40.7,10.1
MISO: K_SX12xx.8 R13.5 | length 21.7
  Top Layer w0.2: v1(7.8,9.55) 8.9,10.65 13.7,10.65 14.1,10.25 R13.5
  MidLayer2 w0.2: K_SX12xx.8 2.41,14.09 3.55,12.95 5.75,12.95 7.8,10.9 v1(7.8,9.55)
MISO_SX: R13.4 U1.17 | length 13.2
  Top Layer w0.2: R13.4 28.5,10.25 32.2,13.95 U1.17
MOSI: K_SX12xx.3 R13.6 | length 23.8
  Top Layer w0.2: K_SX12xx.3 3.9,8.09 3.9,5.773 4.123,5.55 6.379,5.55 6.939,6.111 6.939,7.822 9.317,10.2 13.4,10.2 13.85,9.75 R13.6
MOSI_SX: R13.3 U1.18 | length 14.1
  Top Layer w0.2: R13.3 28.65,9.75 32.85,13.95 U1.18
NetANT_HF_1: ANT_HF.1 C47.2 L14.2 | length 7.1
  Top Layer w0.3: L14.2 C47.2 57.5,6 ccw(c58.2,6) 58.2,5.3 ANT_HF.1
NetANT_LF_1: ANT_LF.1 C41.2 L11.2 | length 7
  Top Layer w0.3: L11.2 C41.2@57.5,29.5 ; C41.2 57.5,30 cw(c58.2,30) 58.2,30.7 ANT_LF.1
NetC1_2: C1.2 Q1.1 U1.6 | length 9.5
  Top Layer w0.3: C1.2@28.1,26.193 Q1.1 28.1,24.65 27.2,23.75 27.2,21.9 27.4,21.7 31.036,21.7 31.55,21.186 U1.6
NetC2_2: C2.2 Q1.3 U1.5 | length 3.6
  Top Layer w0.3: Q1.3 C2.2@30.768,22.8 ; U1.5 32.2,21.297 30.798,22.699 C2.2@30.798,22.752 ; C2.2@30.768,22.8 30.798,22.83 C2.2@30.798,22.752 ; C2.2@30.768,22.8 30.759,22.791 C2.2@30.798,22.752
NetC4_2: C4.2 U1.2 | length 1.6
  Top Layer w0.3: U1.2 C4.2
NetC5_2: C5.2 U1.4 | length 2.3
  Top Layer w0.3: C5.2 32.85,21.776 U1.4
NetC7_2: C7.2 C8.2 C35.2 L1.1 L2.2 U1.25 | length 11.2
  Top Layer w0.4: U1.25@35.55,18 U1.25 C35.2 37.05,17.9 37.625,17.325 39.125,17.325 C8.2 ; L1.1 C7.2 ; C8.2@39.25,17.25 L2.2
  Top Layer w0.5: C35.2 v1(37.05,18.6) ; C7.2 v1(39.4,21.505)
  MidLayer2 w0.5: v1(37.05,18.6) 39.4,20.95 v1@39.4,21.5
NetC9_1: C9.1 L4.1 | length 1
  Top Layer w0.3: L4.1 C9.1
NetC9_2: C9.2 C10.2 L2.1 L3.1 | length 3.1
  Top Layer w0.3: C9.2 C10.2 L2.1 L3.1
NetC11_2: C11.2 C12.2 L4.2 L5.1 | length 3.1
  Top Layer w0.3: L4.2 C11.2 L5.1 ; L5.1@42.4,13.05 C12.2
NetC12_1: C12.1 C13.2 C14.2 L5.2 L6.1 | length 4.2
  Top Layer w0.3: C12.1 L5.2 C13.2 L6.1 C14.2
NetC14_1: C14.1 C15.2 L6.2 U2.1 | length 3.7
  Top Layer w0.3: C14.1 L6.2 C15.2 U2.1@47.65,11.4
NetC16_2: C16.2 L7.1 U1.21 | length 2.9
  Top Layer w0.3: U1.21 34.8,13.72 35.1,13.42 C16.2 L7.1
NetC17_2: C17.2 C18.2 L7.2 | length 2.9
  Top Layer w0.3: 35.1,10.8 L7.2 ; 35.102,10.8 ccw(c35.802,10.8) 35.8,10.1 C17.2 C18.2
NetC18_1: C18.1 U4.5 | length 1.4
  Top Layer w0.3: C18.1 U4.5
NetC19_1: C19.1 U2.3 | length 3.2
  Top Layer w0.3: C19.1 U2.3
NetC19_2: C19.2 U4.2 | length 1.7
  Top Layer w0.3: U4.2 C19.2
NetC20_1: C20.1 C46.2 L14.1 | length 6.9
  Top Layer w0.3: C20.1 52.356,10.344 ccw(c54.152,12.14) 54.152,9.6 C46.2 L14.1
NetC20_2: C20.2 U2.5 | length 1.1
  Top Layer w0.3: U2.5 C20.2
NetC22_1: C22.1 R1.2 R2.1 U2.4 | length 3.6
  Top Layer w0.3: R1.2 R2.1@49.75,8.65 ; U2.4 R2.1@49.75,8.65 ; C22.1 R2.1@49.75,8.65
NetC28_1: C28.1 L8.1 | length 1
  Top Layer w0.3: C28.1 L8.1
NetC28_2: C28.2 C29.2 L1.2 U1.28 | length 3.8
  Top Layer w0.3: U1.28 36.15,19.95 ccw(c36.15,20.177) 36.31,20.016 L1.2@37.1,20.806 ; L1.2 C29.2@37.3,21.955 ; C29.2 C28.2
NetC30_2: C30.2 C31.2 L8.2 L9.1 | length 3.2
  Top Layer w0.3: L8.2 C30.2 L9.1@42.6,23.055 ; C31.2@42.6,21.906 L9.1
NetC31_1: C31.1 C32.2 C33.2 L9.2 L10.1 | length 4.2
  Top Layer w0.3: C31.1 L9.2 44.745,23.05 44.75,23.055 L10.1 C33.2
NetC33_1: C33.1 C34.2 L10.2 U5.3 | length 3.5
  Top Layer w0.3: C33.1 L10.2 C34.2 U5.3
NetC36_1: C36.1 U6.5 | length 1.4
  Top Layer w0.3: C36.1 U6.5 U6.5@39.85,25.8
NetC36_2: C36.2 C37.2 L12.2 | length 2.8
  Top Layer w0.3: L12.2 35.25,25.1 cw(c35.95,25.098) 35.95,25.798 ; 35.95,25.8 C37.2 ; C37.2 36.352,25.8 C36.2
NetC38_1: C38.1 U5.1 | length 3.2
  Top Layer w0.3: C38.1 U5.1
NetC38_2: C38.2 U6.2 | length 1.6
  Top Layer w0.3: U6.2 C38.2
NetC39_1: C39.1 C40.2 L11.1 | length 7
  Top Layer w0.3: C39.1 52.506,25.706 cw(c54.302,23.91) 54.302,26.45 C40.2 L11.1
NetC39_2: C39.2 U5.5 | length 1.1
  Top Layer w0.3: U5.5 C39.2
NetC42_1: C42.1 R15.1 U5.4 | length 2.5
  Top Layer w0.3: U5.4 R15.1 C42.1
NetL3_2: L3.2 U1.27 | length 3.5
  Top Layer w0.3: U1.27 L3.2
NetL12_1: L12.1 L13.2 U1.1 | length 2.9
  Top Layer w0.3: U1.1 34.8,22 35.25,22.45 L13.2 L12.1
NetR6_1: R6.1 R8.2 U3.1 | length 2.5
  Top Layer w0.2: R8.2 R6.1 8.555,33.955 U3.1
NetR7_1: R7.1 R9.2 U3.2 | length 2.4
  Top Layer w0.2: R7.1 R9.2 8.615,32.685 U3.2
NetR10_2: R10.2 U3.7 | length 1.4
  Top Layer w0.2: U3.7 R10.2@16.9,32.685
NRESET: K_SX12xx.10 R14.2 | length 27.5
  Top Layer w0.2: K_SX12xx.10 2.29,16.76 2.29,17.666 1.4,18.556 1.4,22.57 2.152,23.322 6.178,23.322 8.75,20.75 14.3,20.75 15.1,21.55 18.95,21.55 19.55,20.95 R14.2
NRESET_SX: R14.1 U1.7 | length 9.5
  Top Layer w0.2: R14.1 22.175,20.475 29.837,20.475 30.162,20.8 U1.7@30.9,20.8
NSS: K_SX12xx.7 R13.7 | length 20.9
  Top Layer w0.2: K_SX12xx.7 6.18,14.22 7.18,13.22 15.05,13.22 15.53,13.7 v1(15.6,13.7) ; v1(15.6,9.2) 15.65,9.25 R13.7
  MidLayer2 w0.2: v1(15.6,9.2) v1(15.6,13.7)
NSS_SX: R13.2 U1.19 | length 14.9
  Top Layer w0.2: R13.2 28.785,9.25 33.5,13.965 U1.19
RXTX: K_SX12xx.13 R13.8 | length 26.8
  Top Layer w0.2: v1(11.6,8.4) 11.65,8.4 11.95,8.1 15.5,8.1 16.15,8.75 R13.8
  MidLayer2 w0.2: K_SX12xx.13 4.95,21.75 8.674,18.026 10.574,18.026 11.3,17.3 11.3,8.7 v1(11.6,8.4)
RXTX_RF_SX: R1.1 R13.1 RXTX_RFMDOD.1 U1.20 | length 35
  Top Layer w0.2: R13.1 v1(31.5,8.75) RXTX_RFMDOD.1 31.5,11.3 34.15,13.95 34.15,14.2 ; 34.15,14.2 U1.20 ; v1(48,7.55) v1@48.05,7.55 ; v1@48.05,7.55 R1.1
  MidLayer2 w0.2: v1(31.5,8.75) 32.7,7.55 v1(48,7.55)
SCK: K_SX12xx.1 R5.7 | length 19.8
  Top Layer w0.2: K_SX12xx.1 4.95,7.55 8.8,11.4 8.8,12.071 9.429,12.7 15.65,12.7 17,14.05 R5.7
SCK_SX: R5.2 U1.16 | length 12.4
  Top Layer w0.2: R5.2 23.35,14.05 25.05,12.35 29.95,12.35 31.55,13.95 U1.16
SCL: K_SX12xx.23 R11.1 U3.6 | length 28.5
  Top Layer w0.2: v1(14.4,27.3) 14.45,27.35 14.45,30.7 15.165,31.415 U3.6 16.165,31.415 v1(16.75,32) ; v1(19.051,32.215) R11.1
  MidLayer2 w0.2: K_SX12xx.23 14.4,10.97 v1(14.4,27.3) ; v1(16.75,32) 17.15,31.6 18.436,31.6 v1(19.051,32.215)
SDA: K_SX12xx.21 R12.1 U3.5 | length 32.4
  Top Layer w0.2: v1(14.955,26.7) 15.05,26.795 15.05,28.8 v1(15.5,29.25) U3.5 ; v1(20.101,32.215) R12.1
  MidLayer2 w0.2: K_SX12xx.21 14.95,8.98 v1@14.95,26.695 ; v1(15.5,29.25) 19.15,29.25 20.101,30.201 v1(20.101,32.215)
SX_GPIO0: K_SX12xx.25
SX_GPIO1: K_SX12xx.26
SX_GPIO2: K_SX12xx.27
SX_GPIO3: K_SX12xx.28
SX_GPIO4: K_SX12xx.29
SX_GPIO5: K_SX12xx.30
SX_GPIO6: K_SX12xx.31
SX_GPIO7: K_SX12xx.33
VDD_ANA: C6.2 C24.2 C43.2 C45.2 K_SX12xx.22 R6.2 R7.2 R11.2 R12.2 U2.6 U3.3 U3.8 U5.6 | length 132.2
  Top Layer w0.3: 6.051,31.8 6.051,31.399 6.485,30.965 9.051,30.965 9.501,31.415 U3.3
  Top Layer w0.4: R7.2 6.051,31.8 v1(6.051,33.915) 7.385,33.915 R6.2 ; U3.8 C6.2@16.89,33.955 ; C6.2@17.09,33.955 C6.2@16.89,33.955 ; R11.2 R11.2@19.001,33.965 ; R12.2@20.051,33.972 19.009,33.972 R11.2@19.001,33.965 ; U5.6@49.702,25.85 C43.2 50.398,26.922 v1(50.4,26.92) ; U2.6 C45.2@49.75,12.25 ; C45.2 v1(50.45,12.4) ; C6.2@16.89,33.955 C6.2 v3(17.801,33.965) R11.2@19.001,33.965
  Top Layer w0.8: v3(3.85,4.1) 5.6,4.1 7.25,2.45 C24.2 ; K_SX12xx.22 K_SX12xx.22@10.049,6.581
  Top Layer w1: C24.2 K_SX12xx.22@10.049,6.581
  MidLayer2 w0.6: v3(3.85,4.1) 3.8,4.15 2.2,4.15 0.65,5.7 0.65,30.4 4.165,33.915 v1(6.051,33.915) 8.633,33.915 9.368,34.65 15.316,34.65 16.001,33.965 v3(17.801,33.965) ; v3@17.801,33.949 49.501,33.949 51.63,31.82 51.63,26.92 ; v1(50.4,26.92) 51.63,26.92 ; v1(50.45,12.4) 51.63,13.58 51.63,26.92
VDD_FEM: C25.1 K_SX12xx.34 | length 4.1
  Top Layer w0.6: K_SX12xx.34 K_SX12xx.34@10.049,21.859
  Top Layer w1: K_SX12xx.34@10.049,21.859 C25.1
VDD_RF: C23.2 K_SX12xx.2 R3.2 VDD_RFS.1 | length 24.7
  Top Layer w1: C23.2@2.399,2.75 C23.2 2.399,1.451 3.05,0.8 18.7,0.8 20.4,2.5 VDD_RFS.1 VDD_RFS.1@20.8,2.85 ; C23.2@2.41,2.761 K_SX12xx.2
VDD_RFS: C3.2 C21.2 C26.2 C27.2 C44.2 R3.1 U1.3 U1.14 U1.24 VDD_RFS.2 | length 92.1
  Top Layer w0.4: v3(32.475,25.35) 32.475,23.18 33.105,22.55 C3.2 33.15,22.405 33.5,22.056 U1.3 U1.3@33.5,20.75 ; U1.24@35.55,17.35 U1.24 36.35,17.35 C26.2
  Top Layer w0.6: v3(28.6,14) C21.2 29.55,16.05 U1.14 U1.14@30,16.05
  Top Layer w0.65: v3(37.05,14.65) C27.2 C26.2
  Top Layer w1: R3.1 18,3 19.05,4.05 21.6,4.05 22.99,2.66 VDD_RFS.2 v3(26.15,2.5) v3(27.05,2.5)
  MidLayer2 w0.8: v3(27.05,2.5) 27.9,2.5 29.05,3.65 29.05,10 33.35,14.3 36.7,14.3 v3(37.05,14.65) ; v3(28.6,14) 19.55,14 19.55,23.45 24.7,28.6 31.104,28.6 32.475,27.229 v3(32.475,25.35)
  MidLayer2 w1: 19.55,14 19.55,11.1 26.15,4.5 v3(26.15,2.5) v3(27.05,2.5)
pads on no net: K_SX12xx.15 R5.1 R5.8 U1.22

## Polygon pours and split planes (outlines as drawn)
GND on Bottom Layer "GND Bottom" (solid, remove dead copper, pour order 6): 0.3,0.3 64.636,0.3 64.7,0.3 64.7,35.7 0.3,35.7
GND on Top Layer "GND Top" (solid, remove dead copper, pour order 4): 0.3,0.3 64.7,0.3 64.7,35.7 0.3,35.7
GND on MidLayer1 "GND Midlayer1" (solid, remove dead copper, pour order 5): 0.3,0.3 64.636,0.3 64.7,0.3 64.7,35.7 0.3,35.7

## Other copper
Top Layer:
  pour cut-out: 50.325,11.735 50.325,11.99 50.33,11.995 50.305,11.995 50.305,11.695
  pour cut-out: 43.125,26.275 42.715,26.275 42.715,26.235 42.765,26.185 43.175,26.185
  pour cut-out: 43.125,25.325 42.722,25.325 42.722,25.326 42.767,25.371 43.18,25.371 43.18,25.37
  pour cut-out: 38.925,25.325 39.261,25.325 39.266,25.33 39.266,25.355 38.915,25.355 38.91,25.35
  pour cut-out: 38.926,26.275 39.28,26.275 39.28,26.245 39.265,26.23 38.91,26.23
  pour cut-out: 38.775,9.625 39.168,9.625 39.173,9.63 39.173,9.66 38.735,9.66 38.73,9.665
  pour cut-out: 38.775,10.575 39.175,10.575 39.175,10.55 39.163,10.538 38.77,10.538
  region net GND: 38.775,17.675 38.775,18.985 37.775,18.985 37.775,17.675
  pour cut-out: 57.85,5.98 57.85,5.781 57.815,5.781 57.805,5.791 57.805,5.98
  region net GND: 39.875,16.722 39.875,15.548 39.57,15.548 39.57,15.775 38.425,15.775 38.425,16.722
  region net GND: 43.955,14.525 45.1,14.525 45.105,14.53 45.105,14.61 43.956,14.61 43.955,14.609
  region net GND: 47.125,14.61 47.125,13.5 48.25,13.5 48.25,13.78 47.35,13.78 47.35,14.607 47.347,14.61
  region net GND: 40.825,14.575 40.825,13.78 40.83,13.775 41.925,13.775 41.925,14.63 40.825,14.63
  region net GND: 47.325,21.425 47.325,22.575 48.37,22.575 48.375,22.57 48.375,22.207 47.977,22.207 47.555,21.785 47.555,21.425
  region net GND: 40.98,22.575 42.12,22.575 42.12,21.42 41.725,21.42 41.725,22.395 40.98,22.395
  region net GND: 36.87,26.275 35.82,26.275 35.815,26.28 35.815,26.61 36.865,26.61 36.87,26.605
  region net GND: 34.775,23.35 34.775,23.035 33.117,23.035 32.825,23.327 32.825,23.35
  region net GND: 40.825,16.65 40.825,17.72 41.15,17.72 41.15,16.65
  region net GND: 57.976,7 57.976,5.986 57.976,5.985 58.3,5.985 58.3,7
  region net GND: 57.975,9.1 57.975,10.12 58.3,10.12 58.3,9.1
  region net GND: 35.575,12.82 35.575,13.905 35.9,13.905 35.9,12.825 35.905,12.82
  region net GND: 36.65,9.625 35.625,9.625 35.625,9.31 36.65,9.31
  region net GND: 16.319,35.7 17.6,35.7 17.6,35.4 17.65,35.35 17.615,35.315 16.307,35.315
  pour cut-out: 27.512,25.455 29.95,25.455 29.95,21.95 27.512,21.95
  pour cut-out: 57.85,30.059 57.851,30.219 57.85,30.22 57.839,30.22 57.839,30.071
  region net GND: 57.851,30.179 57.85,30.059 57.926,30 58.048,30 58.05,30.002 58.05,30.179
  region net GND: 57.975,27.01 57.975,25.785 58.3,25.781 58.3,27.01
  region net GND: 57.975,29.075 57.975,30.05 58.491,30.05 58.5,30.059 58.5,29.051 57.976,29.051 57.975,29.05
  region net GND: 24.3,0.3 26.1,0.3 26.1,0.6 24.3,0.6
  region net GND: 30.26,15.669 30.608,15.969 30.868,15.717 30.883,15.702 30.833,15.652 30.833,14.427 30.274,14.427 30.26,14.412
  region net GND: 37.825,22.575 38.965,22.575 39.08,21.828 38.825,21.828 38.825,21.395 37.825,21.395
  region net GND: 35.725,23.05 35.725,22.01 36.05,22.01 36.05,23.05
  region net GND: 36.875,21.915 36.875,23.15 36.64,23.15 36.64,21.915
  region net GND: 34.775,24.325 34.775,23.33 34.77,23.325 34.455,23.325 34.455,24.325
  pour cut-out: 42.975,9.625 42.58,9.625 42.57,9.635 42.608,9.672 cw(c42.699,9.581) 42.699,9.71 43.017,9.71
  pour cut-out: 42.975,10.575 42.65,10.575 42.65,10.564 ccw(c42.684,10.564) 42.66,10.54 ccw(c42.998,10.878) 42.998,10.4 43.06,10.4
Bottom Layer:
  region net GND: 30.625,20.2 30.625,15.75 35.075,15.75 35.075,20.2

## Silkscreen, mask and mechanical layers (free items; w line width, h text height)
Top Overlay:
  text "1" at 36.4,21.187 h0.8
  text "SX1276RF1JAS" at 34.1,1.15 h1.5
Bottom Overlay:
  text "PCB_E268V01A 1513" at 24.5,10.55 h1 r270
Mechanical 2:
  lines w0.05: 0,0 0,36 65,36 65,0 0,0
  lines w0.1: 39.7,9.55 41.75,9.55 41.75,10.65 39.7,10.65 39.7,9.55 ; 39.8,25.259 39.8,26.359 41.85,26.359 41.85,25.259 39.8,25.259
Mechanical 3:
  lines w0.05: 4.15,6.6 5.75,6.6 ; 4.95,5.8 4.95,7.4 ; 0,0 65,0 65,36 0,36 0,0
  text "Origin(0;0)" at -10.35,-1.5 h1
Mechanical 14:
  the board outline again, w0.05
Mechanical 15:
  lines w0.05: 54.5,11 65,11 ; 54.5,25 65,25
  lines w0.1: 0,18 65.5,18 ; 39.073,9.756 40.29,9.756 40.29,10.456 39.073,10.456 ; 39.173,25.465 40.39,25.465 40.39,26.165 39.173,26.165 ; 39.073,8.406 39.073,11.806 42.74,11.806 42.74,8.406 39.073,8.406 ; 39.173,24.115 42.84,24.115 42.84,27.515 39.173,27.515 39.173,24.115 ; 41.09,9.756 42.74,9.756 42.74,10.456 41.09,10.456 41.09,9.756 ; 41.19,25.465 41.19,26.165 42.84,26.165 42.84,25.465 41.19,25.465

## Dimensions
0,0 to 0,36 on Mechanical 3
0,0 to 4.95,6.6 on Mechanical 3
0,-0.05 to 4.95,6.6 on Mechanical 3
0,0 to 65,0 on Mechanical 3

## Text inside footprints (layer, text, board x,y; h text height)
K_SX12xx: Top Overlay "2" at 2.05,4.7 h0.8 r270; Top Overlay "1" at 4.55,4.6 h0.8 r270; Top Overlay "21" at 12.2,4.7 h0.8 r270; Top Overlay "22" at 9.65,4.7 h0.8 r270
Shield: Top Overlay "1" at 15.8,4.8 h1